# Altium PCB main.PcbDoc
Units mil, origin at the board's own origin, x right, y up, seen from the top; angles counter-clockwise.
Board outline 1570 x 1570 mil, 2 copper layers (Top Layer, Bottom Layer); 51 components, 38 nets, 150 pads, 24 vias.
Unrouted connection lines stored in the file: 1.
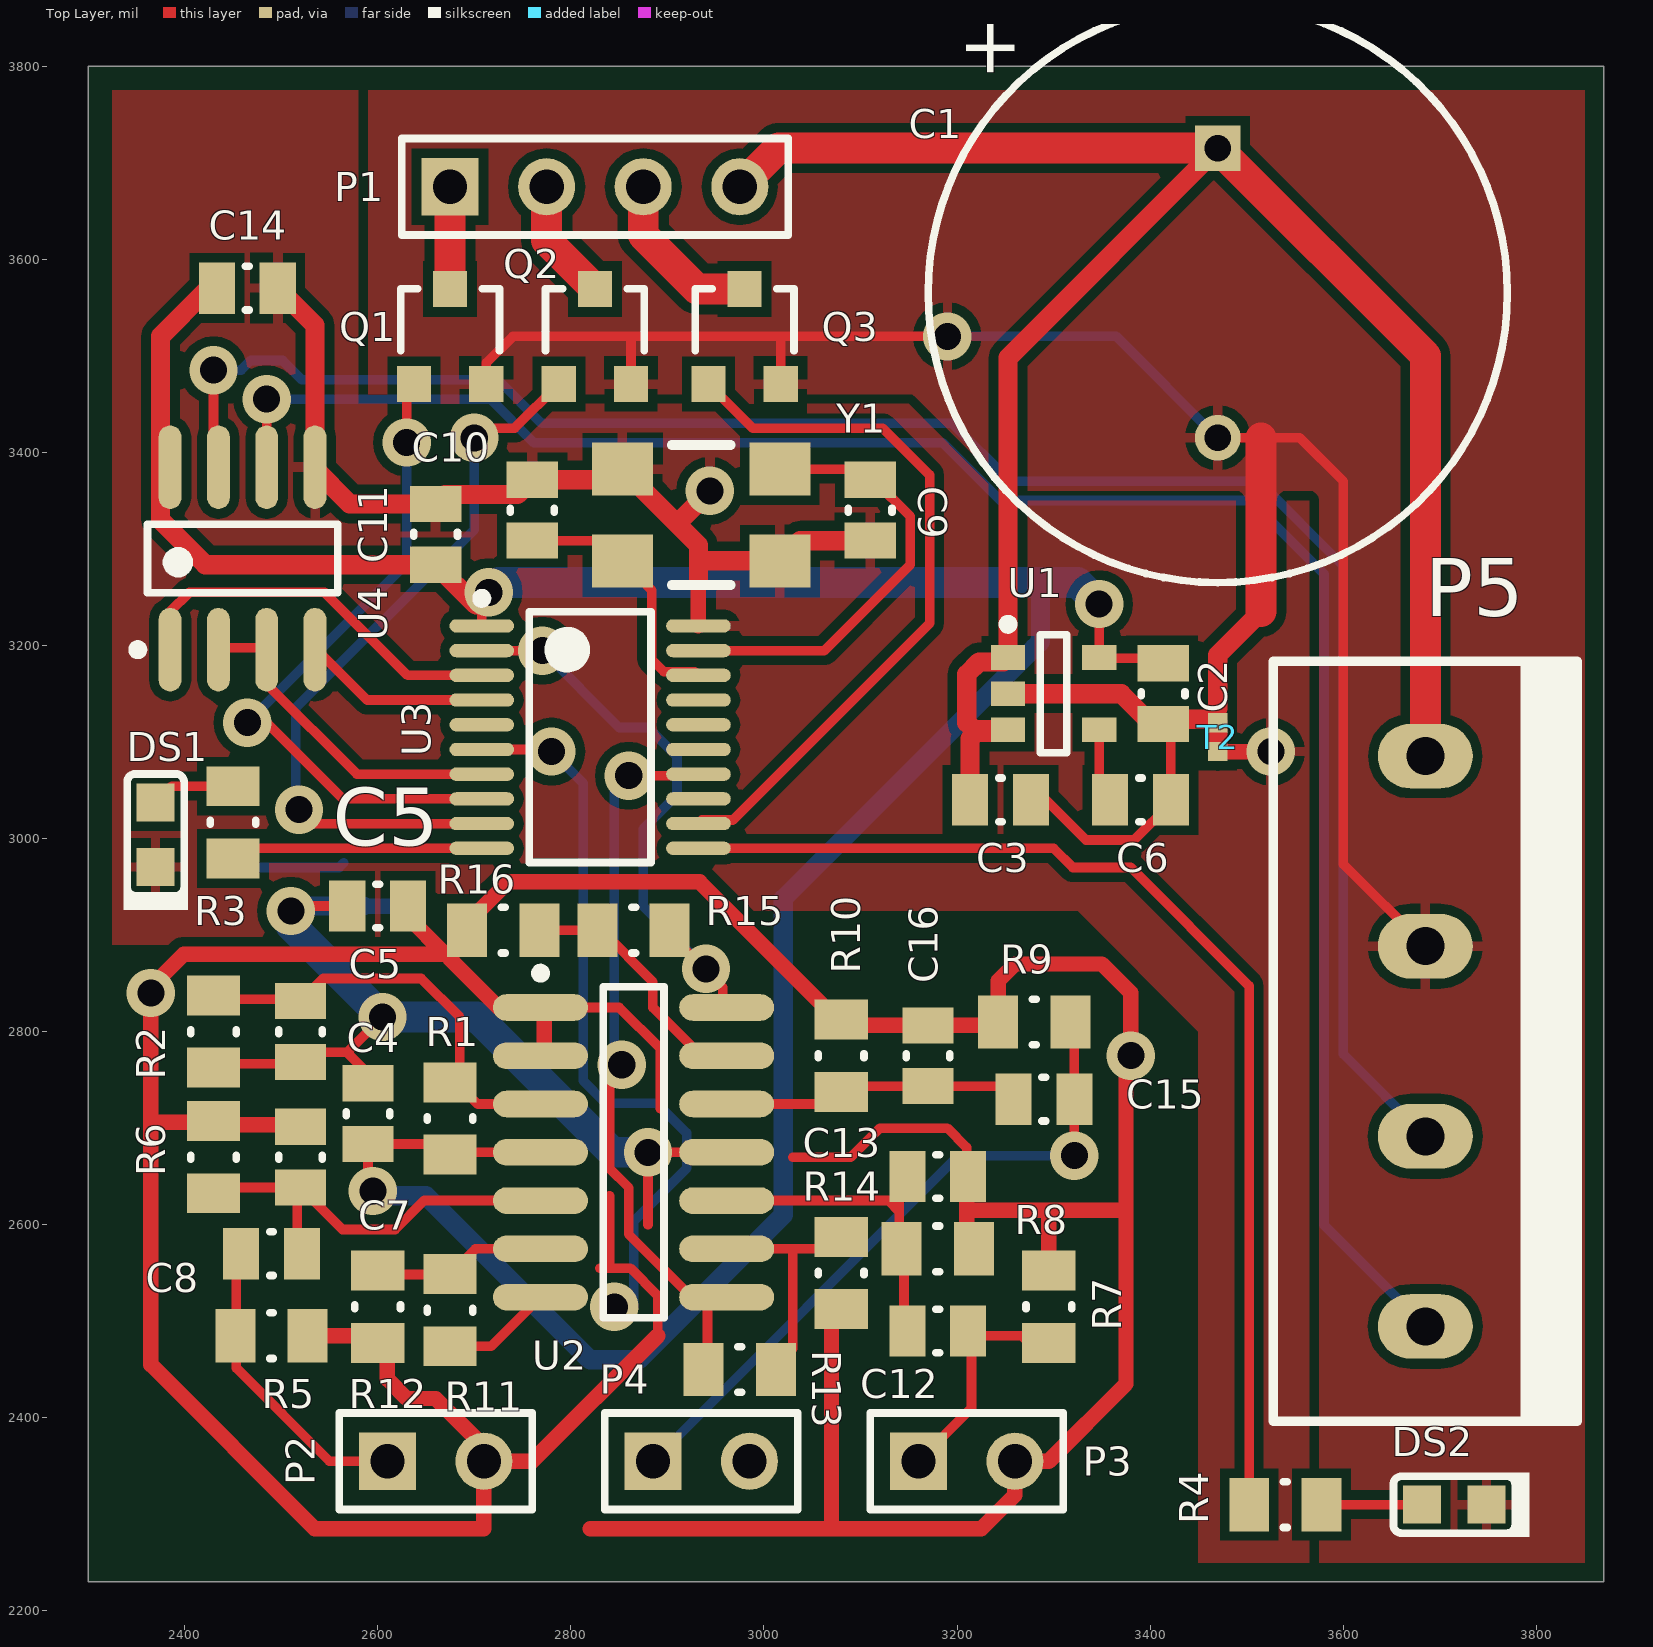
[diagram p0: Top Layer view]
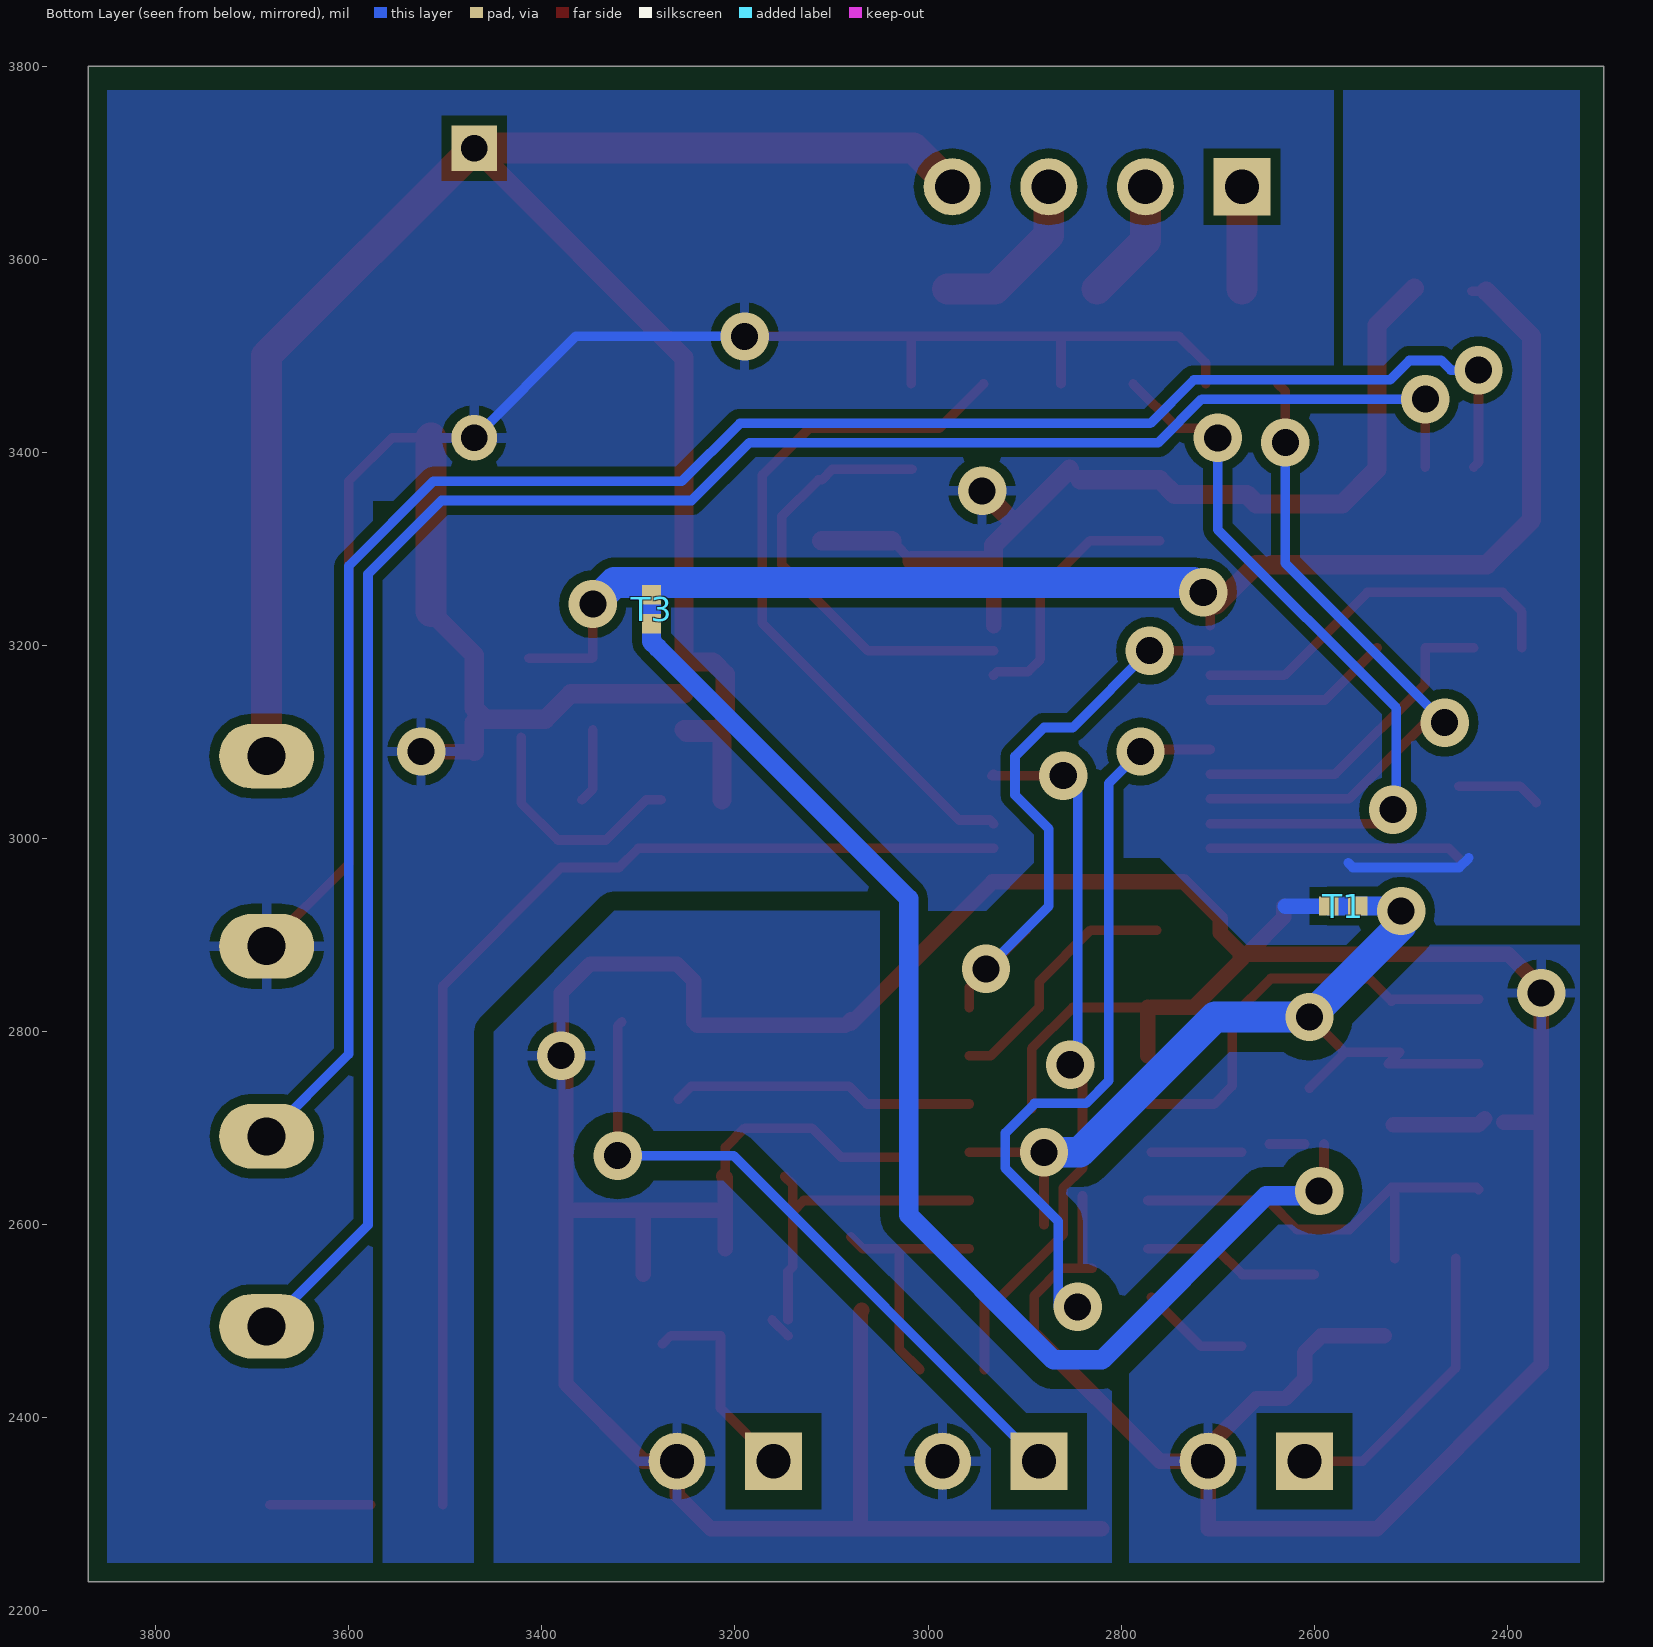
[diagram p1: Bottom Layer view, seen from below]

## Layer stack, top to bottom
Top Solder: solder mask 0.4, Solder Resist, Dk 3.5
Top Layer: signal copper 1.4
Dielectric 1: dielectric 12.6, FR-4, Dk 4.8
Bottom Layer: signal copper 1.4
Bottom Solder: solder mask 0.4, Solder Resist, Dk 3.5

## Board outline
2300,2230 3870,2230 3870,3800 2300,3800

## Design rules (kind name [scope] priority, off if disabled: settings)
Clearance "VGND Polygon clearance" [InNet('VGND') AND InPoly] p1: gap=20
Clearance [All] p2: gap=10
MinimumSolderMaskSliver [All] p1 off: minsoldermaskwidth=10
NetAntennae GuardFoo [InNetClass('Guard')] p1: netantennaetolerance=1000
NetAntennae [All] p2: netantennaetolerance=0
PolygonConnect [All] p1: connectstyle=Relief reliefconductorwidth=10 reliefentries=4 polygonreliefangle="90 Angle" airgapwidth=10
RoomDefinition main [InComponentClass('main')] p1: confinementstyle=ConfineIn formatcopy=TRUE lockcomponents=FALSE outline 2330,2260 3860,2260 3860,3880 2330,3880
RoutingVias [All] p1: holewidth=28 width=50 viastyle="Through Hole" minholewidth=28 minwidth=50 maxholewidth=28 maxwidth=50
SilkToSilkClearance [All] p1 off: silktosilkclearance=10
SilkToSolderMaskClearance [IsPad] p1 off: minsilkscreentomaskgap=10 clearancetoexposedcopper=TRUE
SolderMaskExpansion [All] p1: expansion=4
Width HighCurrentNets [InNetClass('Power')] p1: maxlimit=100 minlimit=10 preferedwidth=32 minimp=50.000000 maximp=50.000000 favimp=50.000000
Width [All] p2: maxlimit=20 minlimit=10 preferedwidth=10 minimp=50.000000 maximp=50.000000 favimp=50.000000
25 further rules are at their usual default settings.

## Classes and differential pairs
net class Guard: AGND VGND
net class Power: AGND AVCC DVCC GND PGND PVCC STRIP_B STRIP_G STRIP_R

## Components (designator, comment, footprint, x,y, rotation, side; value= is the part's Value field where it differs from the comment)
C1 "Cap Pol1" RB7.6-15 3470,3565 r90 top
C2 "CAP 10nF 100V 0805(2012)" CAPC0805(2012)145_L 3413.5,3150 r270 top
C3 "CAP 10nF 100V 0805(2012)" CAPC0805(2012)145_L 3245,3040 r0 top
C4 "CAP 10nF 100V 0805(2012)" CAPC0805(2012)145_L 2590,2715 r90 top
C5 "CAP 10nF 100V 0805(2012)" CAPC0805(2012)145_L 2520,2800 r270 top
C5 "CAP 10nF 100V 0805(2012)" CAPC0805(2012)145_L 2600,2930 r0 top
C6 "CAP 10nF 100V 0805(2012)" CAPC0805(2012)145_L 3390,3040 r0 top
C7 "CAP 10nF 100V 0805(2012)" CAPC0805(2012)145_L 2490,2570 r0 top
C8 "CAP 10nF 100V 0805(2012)" CAPC0805(2012)145_L 2520,2670 r90 top
C9 "CAP 10nF 100V 0805(2012)" CAPC0805(2012)145_L 3110,3340 r270 top
C10 "CAP 10nF 100V 0805(2012)" CAPC0805(2012)145_L 2760,3340 r90 top
C11 "CAP 10nF 100V 0805(2012)" CAPC0805(2012)145_L 2660,3315 r90 top
C12 "CAP 10nF 100V 0805(2012)" CAPC0805(2012)145_L 3180,2490 r180 top
C13 "CAP 10nF 100V 0805(2012)" CAPC0805(2012)145_L 3180,2650 r0 top
C14 "CAP 10nF 100V 0805(2012)" CAPC0805(2012)145_L 2465,3570 r180 top
C15 "CAP 10nF 100V 0805(2012)" CAPC0805(2012)145_L 3290,2730 r180 top
C16 "CAP 10nF 100V 0805(2012)" CAPC0805(2012)145_L 3170,2775 r90 top
DS1 "KP-1608MGC" KING-0603LED_GREEN_V 2370,3003.78 r90 top
DS2 "KP-1608SYCK" KING-0603LED_YELLOW_V 3715,2310 r180 top
P1 "Header 4" HDR1X4 2675,3675 r0 top
P2 "Piezo solder pads" HDR1X2 2610,2355 r0 top
P3 "Piezo solder pads" HDR1X2 3160,2355 r0 top
P4 "Piezo solder pads" HDR1X2 2885,2355 r0 top
P5 "Phoenix_PT1,5/4-5,0H" Phoenix_PT_1,5/4-5,0-H 3685,2790 r180 top
Q1 "IRLML6344TRPbF" AO-SOT23-3_V 2675,3520 r0 top
Q2 "IRLML6344TRPbF" AO-SOT23-3_V 2825,3520 r0 top
Q3 "IRLML6344TRPbF" AO-SOT23-3_V 2980,3520 r0 top
R1 "470K 1% 0805(2012)" RESC0805(2012)_N 2675,2710 r270 top
R2 "470K 1% 0805(2012)" RESC0805(2012)_N 2430,2800 r90 top
R3 "470K 1% 0805(2012)" RESC0805(2012)_N 2450.1,3016.73 r270 top
R4 "470K 1% 0805(2012)" RESC0805(2012)_N 3540,2310 r180 top
R5 "470K 1% 0805(2012)" RESC0805(2012)_N 2490,2485 r180 top
R6 "470K 1% 0805(2012)" RESC0805(2012)_N 2430,2670 r270 top
R7 "470K 1% 0805(2012)" RESC0805(2012)_N 3295,2515 r270 top
R8 "470K 1% 0805(2012)" RESC0805(2012)_N 3180,2575 r180 top
R9 "470K 1% 0805(2012)" RESC0805(2012)_N 3280,2810 r0 top
R10 "470K 1% 0805(2012)" RESC0805(2012)_N 3080,2775 r270 top
R11 "470K 1% 0805(2012)" RESC0805(2012)_N 2675,2511.54 r270 top
R12 "470K 1% 0805(2012)" RESC0805(2012)_N 2600,2515 r90 top
R13 "470K 1% 0805(2012)" RESC0805(2012)_N 2975,2450 r180 top
R14 "470K 1% 0805(2012)" RESC0805(2012)_N 3080,2550 r90 top
R15 "470K 1% 0805(2012)" RESC0805(2012)_N 2865,2905 r0 top
R16 "470K 1% 0805(2012)" RESC0805(2012)_N 2730,2905 r0 top
T1 "net_tie" NetTie 2570,2930 r180 bottom net-tie
T2 "net_tie" NetTie 3470,3105 r90 top net-tie
T3 "net_tie" NetTie 3286.39,3237.35 r90 bottom net-tie
U1 "AP2202K-3.3TRG1" SOT-23-CT5_L 3300,3150 r0 top
U2 "LM324M" M14A_M 2865,2675 r0 top
U3 "MSP430G2153IPW20" TI-PW20_N 2820,3105 r0 top
U4 "ST1480ACDR" M08A_N 2460,3290 r90 top
Y1 "7B-25.000MAAE-T" ABRA-ABM3B-4_V 2935,3335 r180 top

## Footprints (in the part's own frame and the unit in brackets; to place one, negate y for a bottom-side part, rotate by r counter-clockwise, add the part's x,y. Pads: shape width x height; smd on the part's side, far side on the other; paste and mask are expansions set on the pad)
ABRA-ABM3B-4_V [mil] "SMT Crystal, 4-Leads, Body 5.2x3.4mm"
  rect 63x55 smd: 1(-81.5,-47.5) 2(81.5,-47.5) 3(81.5,47.5) 4(-81.5,47.5)
  silkscreen extent -31,-72 31,72, body extent -114,-52 113,51, height 39
AO-SOT23-3_V [mm] "SOT23, 3-Leads, Body 3.016x2.8mm, Pitch 0.95mm"
  rect 0.9x0.95 smd: 1(-0.95,-1.25) 2(0.95,-1.25) 3(0,1.25)
  silkscreen extent -1.3,-0.38 1.3,1.25, body extent -1.14,-1.25 1.17,1.36, height 1.25
CAPC0805(2012)145_L [mm] "Chip Capacitor, Body 2.0x1.2mm, Height 1.45mm, IPC High Density"
  rect 0.95x1.35 smd: 1(-0.8,0) 2(0.8,0)
  silkscreen extent -0.05,-0.58 0.05,0.58, body extent -1.1,-0.72 1.1,0.72, height 1.45
HDR1X2 [mm] "Connector; Header; 2 Position"
  rect 1.5x1.5 hole 0.9: 1(0,0)
  round 1.5 hole 0.9: 2(2.54,0)
  silkscreen extent -1.27,-1.27 3.81,1.27
HDR1X4 [mm] "Connector; Header; 4 Position"
  rect 1.5x1.5 hole 0.9: 1(0,0)
  round 1.5 hole 0.9: 2(2.54,0) 3(5.08,0) 4(7.62,0)
  silkscreen extent -1.27,-1.27 8.89,1.27
KING-0603LED_GREEN_V [mm] "SMT LED, 2-Leads, Body 1.6x0.8mm (0603-Size)"
  rect 1x1 smd paste+0 mask+0: 1(0.85,0) 2(-0.85,0)
  silkscreen extent -1.97,-0.85 1.6,0.85, body extent -0.92,-0.53 1.09,0.53, height 1.1
KING-0603LED_YELLOW_V [mm] "SMT LED, 2-Leads, Body 1.6x0.8mm (0603-Size)"
  rect 1x1 smd paste+0 mask+0: 1(0.85,0) 2(-0.85,0)
  silkscreen extent -1.97,-0.85 1.6,0.85, body extent -0.92,-0.53 1.09,0.53, height 1.1
M08A_N [mm] "SOIC, 8-Leads, Body 4.9x3.9mm, Pitch 1.27mm, IPC Medium Density"
  oval 2.2x0.6 smd: 1(-2.4,1.905) 2(-2.4,0.635) 3(-2.4,-0.635) 4(-2.4,-1.905) 5(2.4,-1.905) 6(2.4,-0.635) 7(2.4,0.635) 8(2.4,1.905)
  silkscreen extent -2.52,-2.5 0.9,2.88, body extent -2,-2.5 2,2.5, height 1.75
M14A_M [mm] "SOIC, 14-Leads, Body 8.6x3.9mm, Pitch 1.27mm, IPC Low Density"
  oval 2.5x0.7 smd: 1(-2.45,3.81) 2(-2.45,2.54) 3(-2.45,1.27) 4(-2.45,0) 5(-2.45,-1.27) 6(-2.45,-2.54) 7(-2.45,-3.81) 8(2.45,-3.81) 9(2.45,-2.54) 10(2.45,-1.27) 11(2.45,0) 12(2.45,1.27) 13(2.45,2.54) 14(2.45,3.81)
  silkscreen extent -2.57,-4.35 0.8,4.83, body extent -2,-4.37 2,4.37, height 1.75
NetTie [mil] "Net Tie"
  rect 20x20 smd: 1(-15,0) 2(15,0)
  Top Layer lines w20: 15,0 -15,0
Phoenix_PT_1,5/4-5,0-H [mm]
  oval 2.5x1.7 hole 1: 1(0,7.5) 2(0,2.5) 3(0,-2.5) 4(0,-7.5)
  silkscreen extent -4,-10 4,10
RB7.6-15 [mm] "Polarized Capacitor (Radial); 2 Leads"
  rect 1.2x1.2 hole 0.7: 1(3.81,0)
  round 1.2 hole 0.7: 2(-3.81,0)
  silkscreen extent -7.62,-7.62 7.62,7.62
RESC0805(2012)_N [mm] "Chip Resistor, Body 2.0x1.3mm, IPC Medium Density"
  rect 1.05x1.4 smd: 1(-0.95,0) 2(0.95,0)
  silkscreen extent -0.05,-0.6 0.05,0.6, body extent -1.1,-0.67 1.1,0.68, height 0.7
SOT-23-CT5_L [mm] "SOT23, 5-Leads, Body 2.9x1.7mm, Pitch 0.95mm, Lead Span 2.8mm, IPC High Density"
  rect 0.9x0.65 smd: 1(-1.2,0.95) 2(-1.2,0) 3(-1.2,-0.95) 4(1.2,-0.95) 5(1.2,0.95)
  silkscreen extent -1.32,-1.55 0.35,1.95, body extent -0.9,-1.55 0.9,1.55, height 1.45
TI-PW20_N [mm] "SOP, 20-Leads, Body 6.5x4.4mm, Pitch 0.65mm, IPC Medium Density"
  oval 1.7x0.35 smd: 1(-2.85,2.925) 2(-2.85,2.275) 3(-2.85,1.625) 4(-2.85,0.975) 5(-2.85,0.325) 6(-2.85,-0.325) 7(-2.85,-0.975) 8(-2.85,-1.625) 9(-2.85,-2.275) 10(-2.85,-2.925) 11(2.85,-2.925) 12(2.85,-2.275) 13(2.85,-1.625) 14(2.85,-0.975) 15(2.85,-0.325) 16(2.85,0.325) 17(2.85,0.975) 18(2.85,1.625) 19(2.85,2.275) 20(2.85,2.925)
  silkscreen extent -2.97,-3.3 1.6,3.77, body extent -2.25,-3.3 2.25,3.3, height 1.2

## Part data
C1: "Polarized Capacitor (Radial)"
C2 C3 C4 C5 C5 C6 C7 C8 C9 C10 C11 C12 C13 C14 C15 C16: library part CMP-1036-03853-1, "CAP 10nF 100V ±10% 0805 (2012 Metric) Thickness 1.45mm SMD"
DS1: library part CMP-0404-00001-1, "LED, SMT, 0603(1608), 1.1mm thickness, Green"
DS2: library part CMP-0404-00003-1, "LED, SMT, 0603(1608), 1.1mm thickness, Yellow"
P1: "Header, 4-Pin"
P2 P3 P4: library part "Header 2", "Header, 2-Pin"
Q1 Q2 Q3: library part CMP-0278-00001-1, "N-channel Enhancement Mode Field-Effect Transistor; 5.8A/30V"
R1 R2 R3 R4 R5 R6 R7 R8 R9 R10 R11 R12 R13 R14 R15 R16: library part CMP-1013-00812-1, "470K 0.125W 1% 0805 (2012 Metric)  SMD"
T1 T2 T3: "Net Tie"
U1: library part CMP-0136-00629-1, "50 mA, 100 mA and 150 mA CMOS LDOs with Active-Low Shutdown and Reference Bypass, 5-Pin SOT-23, Extended Temperature, Tape and Reel"
U2: library part CMP-0055-00738-2, "Low Power Quad Operational Amplifier, 14-pin Narrow SOIC"
U3: library part CMP-0365-00610-1, "16 MHz Mixed Signal Microcontroller with 1 KB Flash, 256 B SRAM and 24 GPIOs, -40 to 85 degC, 20-pin SOP (PW), Green (RoHS & no Sb/Br)"
U4: library part CMP-0058-00814-1, "Multipoint RS-485/RS-422 Transceiver, 8-pin Narrow SOIC"
Y1: library part CMP-0277-00001-1, "Crystal, SMD, 25.000000MHz Stab=50ppm 18.0pF"

## Via types
v1: diameter 50, hole 28, Top Layer to Bottom Layer, 24 vias

## Nets (pads, with @x,y where several pads share a name; then routed paths per layer and width w, separated by ;. In a path a pad name is that pad's centre, name@x,y a point inside that pad or via, vN(x,y) a via of type N, cw(c..) or ccw(c..) an arc to the next point about the centre after c; other vN are vias at no path point)
AGND: C4.2 C5.1@2568.5,2930 C5.2@2520,2768.5 R2.1 T1.2 U2.11 | length 1008.7
  Top Layer w10: R2.1@2430,2766.54 2523.46,2766.54 2511.5,2778.5 2567.99,2778.5 ; v1@2510,2920 2520,2930 C5.1@2568.5,2930 ; C4.2@2605,2741.5 2568.25,2778.25 2590,2800 v1@2609.49,2800 ; v1@2865,2675 v1(2880,2675) ; 2880,2600 v1(2880,2675) ; U2.11@2957.52,2675 v1(2880,2675)
  Bottom Layer w10: v1@2510,2910 v1@2510,2920 ; v1(2510,2925) v1@2515,2930
  Bottom Layer w20: v1@2515,2930 T1.2
  Bottom Layer w32: v1@2510,2910 v1(2605,2815) 2703.02,2815 2843.02,2675 v1@2865,2675
AVCC: C4.1 R1.2 T3.1 U2.4 | length 1462.9
  Top Layer w10: C4.1 2590,2640 v1(2595,2635) ; C4.1@2610,2683.5 2646.5,2683.5 ; R1.2@2675,2675 U2.4
  Bottom Layer w10: v1(2595,2635) v1@2600,2630
  Bottom Layer w20: v1@2600,2630 2650,2630 2820,2460 2870,2460 3020,2610 3020,2937.61 3280,3197.61 3286.39,3203.99 T3.1
DVCC: C2.1 C11.1 C14.2 T3.2 U1.5 U3.1 U4.8 | length 1444.7
  Top Layer w10: C14.2@2421.75,3566.75 C14.2@2436.75,3566.75 ; U3.1 2707.8,3247.8 v1(2715,3255) ; v1(3347.24,3242.76) U1.5 3348.15,3186.5 C2.1@3413.5,3186.5
  Top Layer w20: C14.2@2421.75,3566.75 2375,3520 2375,3330 2421.5,3283.5 C11.1 v1@2701.75,3241.75
  Bottom Layer w10: v1(2715,3255) v1@2725,3265 ; 3300,3265 3303.4,3261.6
  Bottom Layer w32: v1@2725,3265 3300,3265 3325,3265 v1(3347.24,3242.76)
GND: C9.2 C10.2 C11.2 C14.1 DS1.2 T1.1 T2.1 U3.20 U4.5 Y1.2 Y1.4 | length 1197.9
  Top Layer w10: Y1.4 Y1.4@3037.5,3308.5
  Top Layer w16: U3.20 2932.2,3265 ; T2.1 v1(3525,3090)
  Top Layer w20: C14.1 2535,3531.5 2535,3382.52 2571.02,3346.5 C11.2 2669.71,3356.2 2744.71,3356.2 C10.2 Y1.2@2842.5,3371.5 ; Y1.2 2910,3326 ; 2932.2,3265 2932.2,3287.5 ; v1(2944,3360) 2910,3326 ; Y1.4 2932.2,3287.5 ; Y1.4@3037.5,3308.5 C9.2 ; 2910,3326 2932.2,3303.8 2932.2,3287.5
  Bottom Layer w10: 2440,2980 2450,2970 2560,2970 2565,2975 ; v1(2944,3360) v1@2945,3360
  Bottom Layer w16: T1.1 2630,2930
LED_G: R3.2 U3.10 | length 262
  Top Layer w10: R3.2 2460.62,2989.84 U3.10
LED_Y: R4.2 U3.11 | length 1166.8
  Top Layer w10: U3.11 3300.16,2989.84 3320,2970 3380,2970 3502.6,2847.4 R4.2
NetC5_1: C5.1@2520,2831.5 R1.1 R2.2 U2.3 | length 449.5
  Top Layer w10: R2.2@2430,2833.46 C5.1@2521.53,2833.46 ; C5.1@2520,2831.5 2543.5,2855 2645,2855 2685,2815 2685,2743.46 2703.46,2725 U2.3@2772.48,2725
NetC6_1: C6.1 U1.4 | length 77.3
  Top Layer w10: U1.4 3347.24,3051.26 C6.1
NetC7_1: C7.1 P2.1 R5.2 | length 310
  Top Layer w10: C7.1@2453.5,2565 2453.5,2451.5 2550,2355 P2.1
NetC7_2: C7.2 C8.1 R6.2 U2.5 | length 448.7
  Top Layer w10: R6.2@2430,2636.54 2431.97,2638.5 C8.1 ; C7.2@2516.5,2565 2516.5,2635 C8.1 ; U2.5@2772.48,2625 2648.16,2625 2618.16,2595 2563.5,2595 C8.1
NetC9_1: C9.1 U3.19 Y1.1 | length 461.5
  Top Layer w10: U3.19 3062.55,3194.57 3151.57,3283.59 3151.57,3333.42 3113.5,3371.5 C9.1 3099,3382.5 Y1.1
NetC10_1: C10.1 U3.18 Y1.3 | length 272
  Top Layer w10: C10.1 2832.5,3308.5 Y1.3 2883.74,3257.26 2883.74,3185.5 2896.56,3172.68 2928.5,3172.68 U3.18
NetC12_1: C12.1 P3.1 R7.2 | length 216.3
  Top Layer w10: P3.1 3215,2410 3215,2485 3266.54,2485 R7.2@3275,2476.54
NetC12_2: C12.2 C13.1 R8.2 U2.10 | length 398.3
  Top Layer w10: U2.10@2957.52,2625 3128.75,2625 3140,2613.75 R8.2@3140,2580 ; C12.2@3145,2485 C12.2@3161.5,2501.5 ; C12.2@3145,2501.5 3145,2551.54 3140,2556.54 R8.2@3140,2580 ; C13.1 3140,2641.5 R8.2@3140,2580
NetC15_1: C15.1 P4.1 R9.2 | length 707.8
  Top Layer w10: R9.2 3321.5,2805.91 C15.1 v1(3321.5,2671.5)
  Bottom Layer w10: P4.1 3201.5,2671.5 v1(3321.5,2671.5)
NetC15_2: C15.2 C16.1 R10.2 U2.12 | length 314.2
  Top Layer w10: U2.12@2957.52,2725 3063.46,2725 3081.97,2743.5 C16.1 3245,2743.5 C15.2
NetDS1_1: DS1.1 R3.1 | length 87.1
  Top Layer w10: DS1.1 2386.89,3054.13 R3.1
NetDS2_1: DS2.1 R4.1 | length 104.1
  Top Layer w10: R4.1 DS2.1
NetR11_1: R11.1 R12.2 U2.6 | length 183.5
  Top Layer w10: R12.2@2600,2548.46 2674.53,2548.46 2701.06,2575 U2.6 U2.6@2772.48,2575
NetR13_1: R13.1 R14.2 U2.9 | length 261.5
  Top Layer w10: U2.9@2957.52,2575 3030,2575 ; R13.1@3008.46,2450 3030,2471.54 3030,2575 ; R14.2 3067.6,2575 3030,2575
NetR15_1: R15.1 R16.2 U2.13 | length 263.5
  Top Layer w10: R16.2@2763.46,2905 2831.57,2905 2885,2851.57 2885,2825 2935,2775 U2.13@2957.52,2775
PGND: C1.2 C2.2 C3.2 C6.2 DS2.2 P5.3 Q1.2 Q2.2 Q3.2 T2.2 U1.2 | length 2378.2
  Top Layer w10: Q1.2 2712.4,3492.4 2740,3520 2865,3520 ; Q2.2 2862.4,3517.4 2865,3520 ; Q3.2 3017.4,3517.4 3020,3520 ; v1(3190,3520) 3020,3520 ; C3.2 3292.02,3040 3333.59,2998.43 3383.42,2998.43 3421.5,3036.5 C6.2 C2.2@3421.5,3105 ; C1.2 3555,3415 3600,3370 3600,2973.43 P5.3 ; 2865,3520 3020,3520
  Top Layer w20: U1.2 3370,3150 3396.5,3123.5 3458.5,3123.5 3470,3135 3470,3190 3515,3235
  Top Layer w32: 3515,3235 3515,3415
  Bottom Layer w10: v1(3190,3520) 3365,3520 C1.2
PIEZO_1: R15.2 U2.14 U3.2 | length 588.1
  Top Layer w10: U3.2 v1(2770.43,3194.57) ; R15.2@2898.46,2905 2938.46,2865 v1(2940,2865) ; U2.14@2957.52,2825 2957.52,2845.94
  Bottom Layer w10: v1(2770.43,3194.57) 2850,3115 2880,3115 2910,3085 2910,3045 2875,3010 2875,2930 v1(2940,2865)
PIEZO_2: R11.2 U2.7 U3.6 | length 914.2
  Top Layer w10: R11.2 2717.68,2474.13 U2.7 ; U3.6 2772.8,3092.2 v1@2780,3085 ; v1@2835,2525 v1(2845,2515)
  Bottom Layer w10: v1(2780,3090) 2780,3085 2785,3085 2812.76,3057.24 2812.76,2749.11 2836.19,2725.68 2890,2725.68 2890,2725 2920,2695 2920,2658.43 2865,2603.43 2865,2515 v1(2845,2515)
PIEZO_3: R13.2 U2.8 U3.14 | length 751.6
  Top Layer w10: v1@2845,2757.92 2840,2752.92 2840,2658.43 2860,2638.43 2860,2590 2925,2525 2941.54,2525 R13.2@2941.54,2450 ; v1(2860,3065) 2933.82,3065 U3.14
  Bottom Layer w10: v1(2852.76,2765.68) 2845.02,2773.42 2845.02,2834.98 2845,3055 v1@2860,3070
PVCC: C1.1 C3.1 P1.4 P5.4 U1.1 U1.3 | length 2102.4
  Top Layer w20: C3.1 3213.5,3103.5 3222.6,3112.6 U1.3 3250.16,3110 3220,3110 3210,3120 3210,3170 3222.8,3182.8 3248.15,3182.8 U1.1 3252.76,3497.76 C1.1
  Top Layer w32: P1.4 3015,3715 C1.1 3685,3500 P5.4
PWM_B: Q3.1 U3.12 | length 746.9
  Top Layer w10: U3.12 2935.91,3019.13 2967.85,3019.13 3171.57,3222.86 3171.57,3376.41 3122.98,3425 2988.39,3425 Q3.1
PWM_G: Q2.1 U3.9 | length 769.2
  Top Layer w10: v1(2518.59,3029.84) 2533,3015.43 U3.9 ; v1(2700,3415) 2710,3425 2741.81,3425 Q2.1
  Bottom Layer w10: v1(2518.59,3029.84) 2515,3033.43 2515,3135 2700,3320 v1(2700,3415)
PWM_R: Q1.1 U3.8 | length 697.8
  Top Layer w10: v1(2465,3120) 2485,3120 2563.98,3041.02 U3.8 ; v1(2630,3410) 2630,3463.19 Q1.1
  Bottom Layer w10: v1(2465,3120) 2630,3285 v1(2630,3410)
RS485_D+: P5.1 U4.6 | length 2063.2
  Top Layer w10: U4.6 v1(2485,3455)
  Bottom Layer w10: v1(2485,3455) 2716.57,3455 2761.57,3410 3185,3410 3245,3350 3503.9,3350 3580,3273.9 3580,2599.72 P5.1
RS485_D-: P5.2 U4.7 | length 1990.7
  Top Layer w10: v1(2430,3485) 2430,3389.49 U4.7
  Bottom Layer w10: v1(2430,3485) 2458.43,3485 2468.43,3495 2501.57,3495 2521.57,3475 2724.85,3475 2769.85,3430 3195,3430 3255,3370 3512.19,3370 3600,3282.19 3600,2776.57 P5.2
RS485_EN: U3.7 U4.2 U4.3 | length 349
  Top Layer w10: U4.2@2435,3197.48 2485,3197.48 2485,3160 2578.39,3066.61 U3.7
RS485_RX: U3.3 U4.1 | length 404.2
  Top Layer w10: U4.1@2385,3197.48 2385,3235 2405,3255 2545,3255 2631.02,3168.98 U3.3
RS485_TX: U3.4 U4.4 | length 195.2
  Top Layer w10: U4.4@2535,3197.48 2589.09,3143.39 U3.4
STRIP_B: P1.3 Q3.3 | length 178.1
  Top Layer w32: P1.3 2875,3625 2930.79,3569.21 Q3.3
STRIP_G: P1.2 Q2.3 | length 126.5
  Top Layer w32: P1.2 2775,3619.21 Q2.3
STRIP_R: P1.1 Q1.3 | length 105.8
  Top Layer w32: Q1.3 P1.1
VGND: C5.2@2631.5,2930 C8.2 C13.2 C16.2 P2.2 P3.2 P4.2 R5.1 R6.1 R7.1 R8.1 R9.1 R10.1 R12.1 R14.1 R16.1 U2.1 U2.2 | length 5171.3
  Top Layer w0: 2830,2555 2840,2565
  Top Layer w10: U2.1 2772.48,2825 2850,2825 2892.76,2782.24 2892.76,2720 ; 2830,2555 2840,2555 ; 2840,2630 2840,2565 2840,2555 ; 2890,2485 2890,2526.57 2861.57,2555 2840,2555 ; 3030,2670 3090,2670 3120,2700 3190,2700 3210,2680 3210,2651.5 C13.2
  Top Layer w16: 2365,2705 2365,2455 2535,2285 2710,2285 P2.2 ; v1(2365,2840) 2365,2846.09 2398.95,2880.04 2669.96,2880.04 ; v1@2375,2840 2365,2830 2365,2705.96 R6.1@2404.04,2705.96 ; R6.1@2423.46,2710 2430,2703.46 C8.2@2518.03,2703.46 ; R5.1 2592.6,2485 2610,2467.6 2610,2440 2630,2420 2660,2420 2710,2370 P2.2 ; C5.2@2631.5,2930 2631.5,2918.5 2669.96,2880.04 ; R16.1@2674.93,2880 R16.1@2674.96,2880.04 ; 2676.52,2876.52 2675,2875 2725,2825 U2.1 ; U2.2@2772.48,2775 U2.1@2772.48,2825 ; 2820,2285 3070,2285 ; 2890,2485 2760,2355 P2.2 ; R14.1@3068.46,2511.54 3070,2510 3070,2285 ; R10.1@3080,2808.46 2933.46,2955 2735,2955 2697.46,2917.46 2697.46,2902.54 R16.1@2674.96,2880.04 ; R10.1 3085.91,2806.5 C16.2 3239.09,2806.5 R9.1 3242.6,2852.6 3260,2870 3350,2870 3380,2840 v1(3380,2775) 3375,2770 3375,2615 ; R8.1@3210,2575 3210,2615 ; C13.2 3210,2648.5 3210,2615 ; R7.1@3295,2548.46 3295,2615 ; v1@3370,2775 v1@3375,2775 ; 2669.96,2880.04 R16.1@2674.96,2880.04 ; 3070,2285 3225,2285 3260,2320 P3.2 3295,2355 3375,2435 3375,2615 ; 3210,2615 3295,2615 ; 3295,2615 3375,2615
  Bottom Layer w16: v1@2365,2830 v1(2365,2840)
pads on no net: U3.5 U3.13 U3.15 U3.16 U3.17

## Polygon pours and split planes (outlines as drawn)
VGND on Bottom Layer "Top Layer-No Net" (solid, remove dead copper, pour order 6): 2325,2250 3450,2250 3450,2800 3325,2925 2940,2925 2885,2980 2760,2980 2670,2890 2325,2890
GND on Bottom Layer "Top Layer-No Net" (solid, pour order 10): 2325,3775 2580,3775 2580,3450.3 3149.7,3450.3 3225,3375 3225,3350 3565,3350 3565,2250 3450,2250 3450,2799.96 3325,2925 2940,2925 2885,2980 2760,2980 2670,2890 2325,2890
PGND on Bottom Layer "Top Layer-No Net" (solid, pour order 4): 2580,3775 3850,3775 3850,2250 3575,2250 3575,3350 3225,3350 3225,3375 3155,3445 2580,3445
GND on Top Layer "Top Layer-No Net" (solid, pour order 8): 2580,3775 2580,3450 3150,3450 3250,3350 3565,3350 3565,2250 3450,2250 3450,2800 3325,2925 2940,2925 2885,2980 2760,2980 2670,2890 2325,2890 2325,3775
PGND on Top Layer "Top Layer-No Net" (solid, pour order 12): 2580,3775 2580,3450 3150,3450 3225,3375 3225,3350 3575,3350 3575,2250 3850,2250 3850,3775

## Other copper
Bottom Layer:
  pour cut-out: 2791.4,2239.68 2811.4,2239.68 2810,2241.08 2810,2449.68 2791.4,2449.68

## Silkscreen, mask and mechanical layers (free items; w line width, h text height)
Mechanical 1:
  lines w10: 2780,3085 2780,3090

## Dimensions
2300,3800 to 3870,3800 on Top Layer
3870,2230 to 3870,3800 on Top Layer
3870,2230 to 3470,3870 on Top Layer

## Text inside footprints (layer, text, board x,y; h text height)
C1: Top Overlay "+" at 3260,3785 h59.06 r90